# EAGLE board hub_interior (EAGLE 7.6.0)
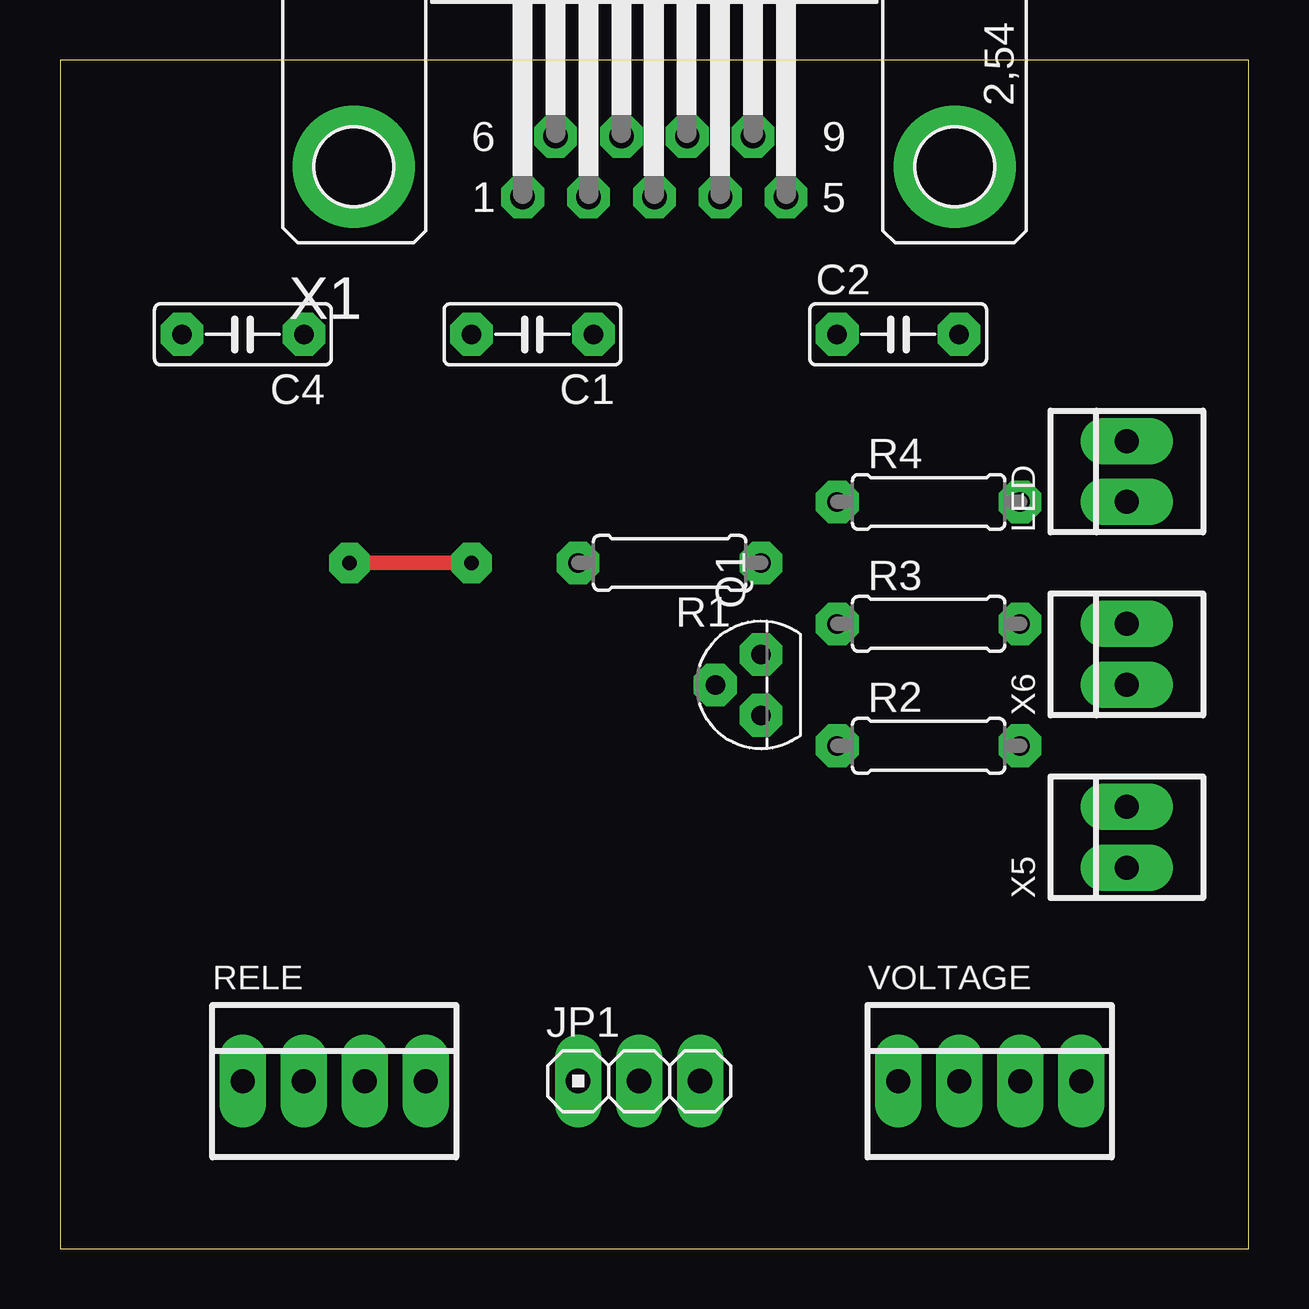
[diagram p0: board, top side]
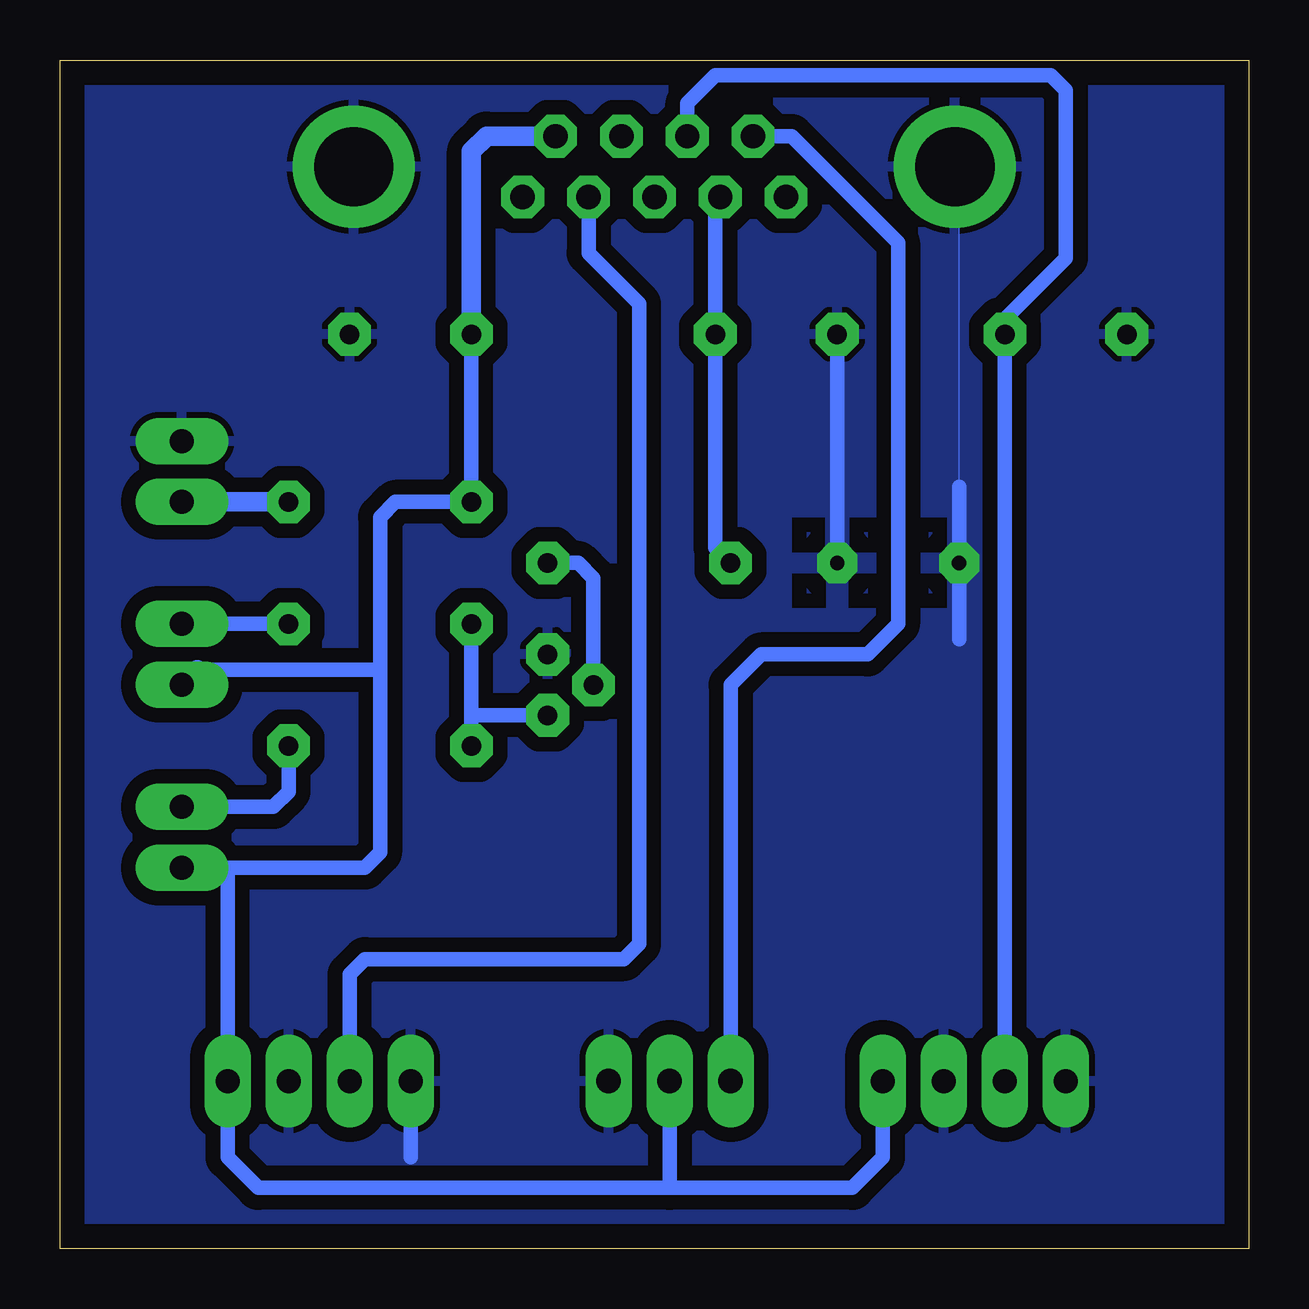
[diagram p1: board, bottom side, seen from below]

Size 49.53 x 49.53 mm. Coordinates in mm from the lower left corner, seen from the top.
Outline: 0,0 49.53,0 49.53,49.53 0,49.53 0,0
Copper layers (1*16): Top 0.035mm / dielectric 1.5mm / Bottom 0.035mm
Design rules "default": minimum track width 10mil, minimum drill 24mil, track to track 8mil, track to pad 8mil, pad to pad 8mil, via to via 8mil, smd to smd 8mil, copper to edge 40mil, drill to drill 8mil, minimum pad ring 10mil, minimum via ring 8mil, stop-mask expansion 4mil, vias tented up to drill 0mil, thermal gap 10mil

## Footprints (pad centres in the part's own frame; a part is rotated, then mirrored left to right if it is on the bottom)
C050-025X075 = drill 0.813 pad 1.778 octagon: 1 -2.54,0; 2 2.54,0
1X03 = drill 1.016 pad 1.93 long: 1 -2.54,0; 2 0,0; 3 2.54,0
22-23-2021 = drill 1 pad 1.93 long: 1 -1.27,0; 2 1.27,0
TO92 = drill 0.813 pad 1.778 octagon: 1 1.27,0; 2 0,1.905; 3 -1.27,0
0207/7 = drill 0.813 pad 1.778 octagon: 1 -3.81,0; 2 3.81,0
22-23-2041 = drill 1 pad 1.93 long: 1 -3.81,0; 2 -1.27,0; 3 1.27,0; 4 3.81,0
F09HP = drill 1.016 pad 1.778 octagon: 1 -5.486,-1.27; 2 -2.743,-1.27; 3 0,-1.27; 4 2.743,-1.27; 5 5.486,-1.27; 6 -4.115,1.27; 7 -1.372,1.27; 8 1.372,1.27; 9 4.115,1.27 | drill 3.302 pad 5.08: G1 -12.522,0; G2 12.522,0

## Placement (x,y rotation side)
C1  10nF  [C050-025X075]  19.68,38.1 180 top
C2  10nF  [C050-025X075]  34.92,38.1 0 top
C4  [C050-025X075]  7.62,38.1 180 top
JP1  [1X03]  24.13,6.99 0 top
LED  LED_VERDE  [22-23-2021]  44.45,32.38 90 top
Q1  BC337  [TO92]  29.21,23.5 90 top
R1  10kΩ  [0207/7]  25.4,28.57 180 top
R2  1kΩ  [0207/7]  36.2,20.95 0 top
R3  470Ω  [0207/7]  36.2,26.04 0 top
R4  470Ω  [0207/7]  36.2,31.11 0 top
RELE  22-23-2041  [22-23-2041]  11.43,6.99 0 top
VOLTAGE  22-23-2041  [22-23-2041]  38.73,6.99 0 top
X1  [F09HP]  24.77,45.09 0 top
X5  BUZZER  [22-23-2021]  44.45,17.14 90 top
X6  LED_ROJO  [22-23-2021]  44.45,24.77 90 top

## Library data of the parts
C1 C2 C4 R1-R4 = rcl
JP1 = pinhead
LED X5 X6 = con-molex; MF: MOLEX; MPN: 22-23-2021; OC_FARNELL: 1462926; OC_NEWARK: 25C3832
Q1 = transistor-npn
RELE VOLTAGE = con-molex; MF: MOLEX; MPN: 22-23-2041; OC_FARNELL: 1462920; OC_NEWARK: 38C0355
X1 = con-subd; OC_FARNELL: unknown; OC_NEWARK: unknown

## Nets
+5V: C2.1 JP1.2 R4.1 RELE.4 VOLTAGE.4 X1.9 X5.1 X6.1
GND: C1.2 C2.2 C4.2 JP1.3 LED.2 Q1.1 RELE.1 RELE.3 VOLTAGE.1 VOLTAGE.3 X1.G1 X1.G2
N$1: Q1.2 R1.1
N$2: C1.1 R1.2 X1.2
N$3: Q1.3 R2.1 R3.1
N$4: C4.1 RELE.2 X1.7
N$5: R2.2 X5.2
N$6: R3.2 X6.2
N$7: LED.1 R4.2
N$10: VOLTAGE.2 X1.4
N$13: JP1.1 X1.6

## Tracks (layer width: path | path; a pad name or v marks a point on that pad's centre or on a via)
+5V
  Bottom 0.61: C2.1 R4.1 35.56,31.11 36.2,30.48 36.2,24.13 | 36.2,24.13 36.2,16.51 36.83,15.88 42.55,15.88 | 42.55,15.88 X5.1 | 43.81,24.13 36.2,24.13 | 24.13,2.54 16.51,2.54 15.24,3.81 RELE.4 | JP1.2 24.13,2.54 | 24.13,2.54 41.27,2.54 42.55,3.81 VOLTAGE.4 42.55,15.88
  Bottom 0.813: C2.1 32.38,45.72 31.75,46.35 X1.9 | X6.1 43.81,24.13
GND  (via drill 0.6 pad 1.68)
  Top 0.61: v17.14,28.57 v12.06,28.57
  Bottom 0: v12.06,28.57 12.06,44.91 X1.G1
  Bottom 0.61: C1.2 v17.14,28.57 | 12.06,31.75 v12.06,28.57 12.06,25.4 | VOLTAGE.1 34.92,3.81
  pour Bottom (isolate 0.61, rank 4): -1.27,50.16 -1.27,-0.64 50.8,-0.64 50.8,50.16
N$1
  Bottom 0.61: Q1.2 27.3,27.94 27.94,28.57 R1.1
N$2
  Bottom 0.61: 22.23,43.61 C1.1 22.23,29.21 R1.2
  Bottom 0.813: X1.2 22.23,43.61
N$3
  Bottom 0.61: Q1.3 32.38,22.23 | R2.1 32.38,22.23 | 32.38,22.23 R3.1
N$4
  Bottom 0.61: X1.7 23.39,47.73 22.23,48.9 8.26,48.9 7.62,48.26 7.62,41.27 10.16,38.73 C4.1 RELE.2
N$5
  Bottom 0.61: X5.2 40.64,18.41 40.01,19.05 R2.2
N$6
  Bottom 0.61: R3.2 X6.2
N$7
  Bottom 0.813: LED.1 R4.2
N$8
  pour Bottom (isolate 0.813): 13.34,29.84 10.79,29.84 10.79,27.3 13.34,27.3
  pour Bottom (isolate 0.813): 18.41,29.84 15.88,29.84 15.88,27.3 18.41,27.3
N$10
  Bottom 0.61: VOLTAGE.2 37.47,11.43 36.83,12.06 26.04,12.06 25.4,12.7 25.4,39.37 27.51,41.48 X1.4
N$13
  Bottom 0.61: X1.6 19.05,46.35 14.61,41.91 14.61,26.04 15.88,24.77 20.32,24.77 21.59,23.5 JP1.1